# Altium PCB PCB_prob_2024-08-28.pcbdoc
Units mm, origin at the board's own origin, x right, y up, seen from the top; angles counter-clockwise.
Board outline 332.87 x 129.79 mm, 2 copper layers (Top Layer, Bottom Layer); 57 components, 34 nets, 213 pads, 5 vias.
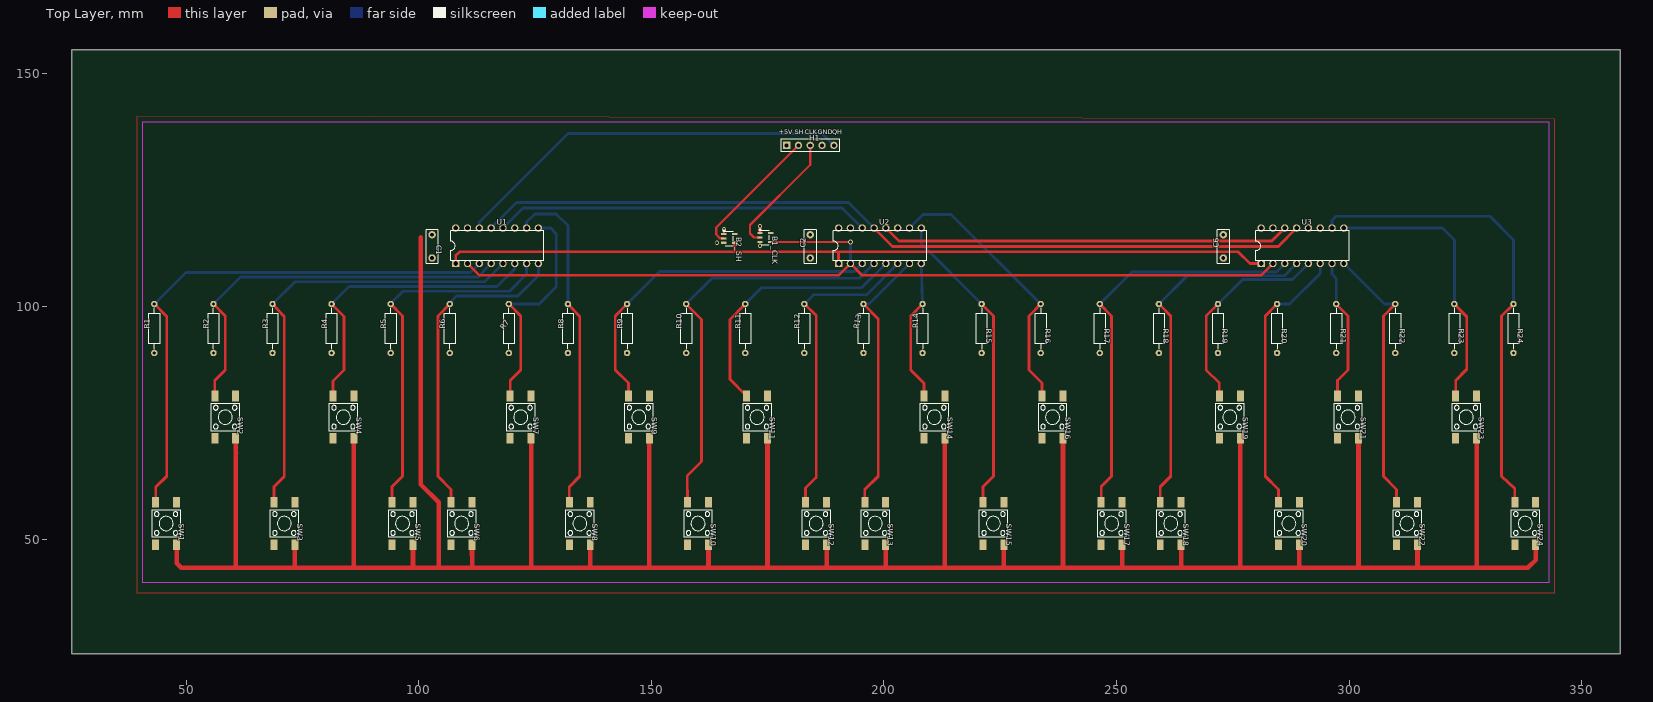
[diagram p0: Top Layer view]
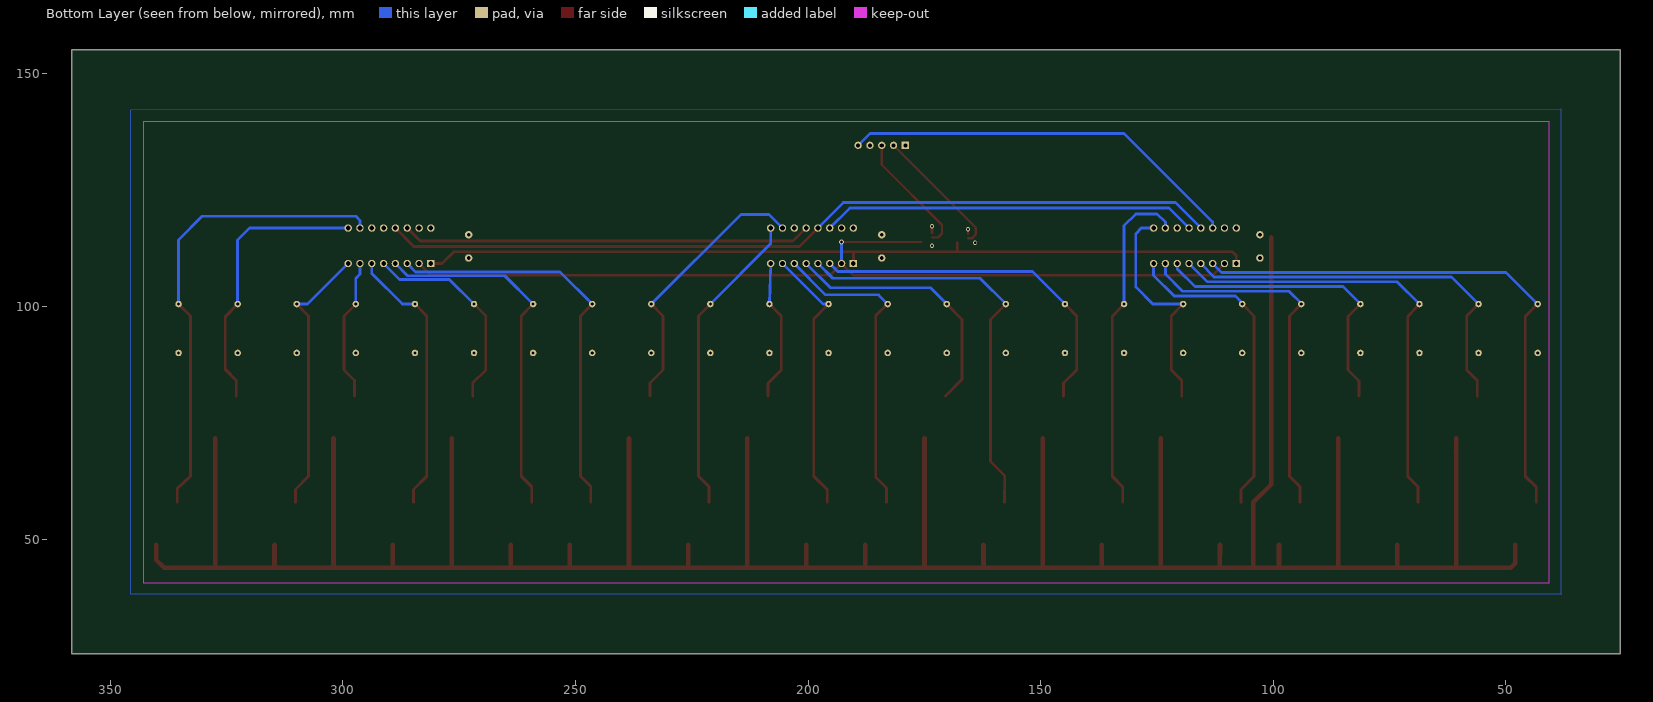
[diagram p1: Bottom Layer view, seen from below]

## Layer stack, top to bottom
Top Layer: signal copper (thickness not stored)
Dielectric: dielectric 0.32, FR-4, Dk 4.8
Bottom Layer: signal copper (thickness not stored)

## Board outline
358.267,25.4 25.4,25.4 25.4,155.194 358.267,155.194

## Components (designator, comment, footprint, x,y, rotation, side; value= is the part's Value field where it differs from the comment)
B1_CLK "SN74LVC1G125DBVR" SOT-23-5_L3.0-W1.7-P0.95-LS2.8-BL 174.498,114.808 r270 top
B2_SH "SN74LVC1G125DBVR" SOT-23-5_L3.0-W1.7-P0.95-LS2.8-BL 166.751,114.615 r270 top
C1 "100nF" CAP-TH_L7.2-W2.5-P5.00-D0.5 102.87,112.903 r270 top
C2 "100nF" CAP-TH_L7.2-W2.5-P5.00-D0.5 184.15,112.903 r90 top
C6 "100nF" CAP-TH_L7.2-W2.5-P5.00-D0.5 272.923,112.903 r90 top
H1 "HDR-F-2.54_1x5" HDR-F-2.54_1X5 184.15,134.62 r0 top
R1 "110kΩ" RES-TH_BD2.3-L6.5-P10.50-D0.5 43.18,95.25 r90 top
R2 "110kΩ" RES-TH_BD2.3-L6.5-P10.50-D0.5 55.88,95.25 r90 top
R3 "110kΩ" RES-TH_BD2.3-L6.5-P10.50-D0.5 68.58,95.25 r90 top
R4 "110kΩ" RES-TH_BD2.3-L6.5-P10.50-D0.5 81.28,95.25 r90 top
R5 "110kΩ" RES-TH_BD2.3-L6.5-P10.50-D0.5 93.98,95.25 r90 top
R6 "110kΩ" RES-TH_BD2.3-L6.5-P10.50-D0.5 106.68,95.25 r90 top
R7 "110kΩ" RES-TH_BD2.3-L6.5-P10.50-D0.5 119.38,95.25 r90 top
R8 "110kΩ" RES-TH_BD2.3-L6.5-P10.50-D0.5 132.08,95.25 r90 top
R9 "110kΩ" RES-TH_BD2.3-L6.5-P10.50-D0.5 144.78,95.25 r270 top
R10 "110kΩ" RES-TH_BD2.3-L6.5-P10.50-D0.5 157.48,95.25 r270 top
R11 "110kΩ" RES-TH_BD2.3-L6.5-P10.50-D0.5 170.18,95.25 r270 top
R12 "110kΩ" RES-TH_BD2.3-L6.5-P10.50-D0.5 182.88,95.25 r270 top
R13 "110kΩ" RES-TH_BD2.3-L6.5-P10.50-D0.5 195.58,95.25 r270 top
R14 "110kΩ" RES-TH_BD2.3-L6.5-P10.50-D0.5 208.28,95.25 r270 top
R15 "110kΩ" RES-TH_BD2.3-L6.5-P10.50-D0.5 220.98,95.25 r270 top
R16 "110kΩ" RES-TH_BD2.3-L6.5-P10.50-D0.5 233.68,95.25 r270 top
R17 "110kΩ" RES-TH_BD2.3-L6.5-P10.50-D0.5 246.38,95.25 r270 top
R18 "110kΩ" RES-TH_BD2.3-L6.5-P10.50-D0.5 259.08,95.25 r270 top
R19 "110kΩ" RES-TH_BD2.3-L6.5-P10.50-D0.5 271.78,95.25 r270 top
R20 "110kΩ" RES-TH_BD2.3-L6.5-P10.50-D0.5 284.48,95.25 r270 top
R21 "110kΩ" RES-TH_BD2.3-L6.5-P10.50-D0.5 297.179,95.25 r270 top
R22 "110kΩ" RES-TH_BD2.3-L6.5-P10.50-D0.5 309.879,95.25 r270 top
R23 "110kΩ" RES-TH_BD2.3-L6.5-P10.50-D0.5 322.579,95.25 r270 top
R24 "110kΩ" RES-TH_BD2.3-L6.5-P10.50-D0.5 335.279,95.25 r270 top
SW1 "SW" SW-SMD_4P-L6.0-W6.0-P4.50-LS9.0-2 45.72,53.34 r270 top
SW2 "SW" SW-SMD_4P-L6.0-W6.0-P4.50-LS9.0-2 58.42,76.2 r270 top
SW3 "SW" SW-SMD_4P-L6.0-W6.0-P4.50-LS9.0-2 71.12,53.34 r270 top
SW4 "SW" SW-SMD_4P-L6.0-W6.0-P4.50-LS9.0-2 83.82,76.2 r270 top
SW5 "SW" SW-SMD_4P-L6.0-W6.0-P4.50-LS9.0-2 96.52,53.34 r270 top
SW6 "SW" SW-SMD_4P-L6.0-W6.0-P4.50-LS9.0-2 109.22,53.34 r270 top
SW7 "SW" SW-SMD_4P-L6.0-W6.0-P4.50-LS9.0-2 121.92,76.2 r270 top
SW8 "SW" SW-SMD_4P-L6.0-W6.0-P4.50-LS9.0-2 134.62,53.34 r270 top
SW9 "SW" SW-SMD_4P-L6.0-W6.0-P4.50-LS9.0-2 147.32,76.2 r270 top
SW10 "SW" SW-SMD_4P-L6.0-W6.0-P4.50-LS9.0-2 160.02,53.34 r270 top
SW11 "SW" SW-SMD_4P-L6.0-W6.0-P4.50-LS9.0-2 172.72,76.2 r270 top
SW12 "SW" SW-SMD_4P-L6.0-W6.0-P4.50-LS9.0-2 185.42,53.34 r270 top
SW13 "SW" SW-SMD_4P-L6.0-W6.0-P4.50-LS9.0-2 198.12,53.34 r270 top
SW14 "SW" SW-SMD_4P-L6.0-W6.0-P4.50-LS9.0-2 210.82,76.2 r270 top
SW15 "SW" SW-SMD_4P-L6.0-W6.0-P4.50-LS9.0-2 223.52,53.34 r270 top
SW16 "SW" SW-SMD_4P-L6.0-W6.0-P4.50-LS9.0-2 236.22,76.2 r270 top
SW17 "SW" SW-SMD_4P-L6.0-W6.0-P4.50-LS9.0-2 248.92,53.34 r270 top
SW18 "SW" SW-SMD_4P-L6.0-W6.0-P4.50-LS9.0-2 261.62,53.34 r270 top
SW19 "SW" SW-SMD_4P-L6.0-W6.0-P4.50-LS9.0-2 274.32,76.2 r270 top
SW20 "SW" SW-SMD_4P-L6.0-W6.0-P4.50-LS9.0-2 287.02,53.34 r270 top
SW21 "SW" SW-SMD_4P-L6.0-W6.0-P4.50-LS9.0-2 299.719,76.2 r270 top
SW22 "SW" SW-SMD_4P-L6.0-W6.0-P4.50-LS9.0-2 312.419,53.34 r270 top
SW23 "SW" SW-SMD_4P-L6.0-W6.0-P4.50-LS9.0-2 325.119,76.2 r270 top
SW24 "SW" SW-SMD_4P-L6.0-W6.0-P4.50-LS9.0-2 337.819,53.34 r270 top
U1 "SN74HC165N" DIP-16_L19.8-W6.5-P2.54-LS7.6-BL 116.84,113.03 r0 top
U2 "SN74HC165N" DIP-16_L19.8-W6.5-P2.54-LS7.6-BL 199.136,113.03 r0 top
U3 "SN74HC165N" DIP-16_L19.8-W6.5-P2.54-LS7.6-BL 289.941,113.03 r0 top

## Footprints (in the part's own frame and the unit in brackets; to place one, negate y for a bottom-side part, rotate by r counter-clockwise, add the part's x,y. Pads: shape width x height; smd on the part's side, far side on the other; paste and mask are expansions set on the pad)
CAP-TH_L7.2-W2.5-P5.00-D0.5 [mm]
  round 1.6 hole 0.8 paste+0 mask+0.05: 1(-2.5,0) 2(2.5,0)
  silkscreen extent -3.6,-1.25 3.6,1.25
DIP-16_L19.8-W6.5-P2.54-LS7.6-BL [mm]
  rect 1.6x1.6 hole 1 paste+0 mask+0.051: 1(-8.89,-3.81)
  round 1.6 hole 1 paste+0 mask+0.051: 2(-6.35,-3.81) 3(-3.81,-3.81) 4(-1.27,-3.81) 5(1.27,-3.81) 6(3.81,-3.81) 7(6.35,-3.81) 8(8.89,-3.81) 9(8.89,3.81) 10(6.35,3.81) 11(3.81,3.81) 12(1.27,3.81) 13(-1.27,3.81) 14(-3.81,3.81) 15(-6.35,3.81) 16(-8.89,3.81)
  silkscreen extent -10,-3.2 10,3.2
HDR-F-2.54_1X5 [mil]
  rect 62x62 hole 35 paste+0 mask+2: 1(-200,0)
  round 62 hole 35 paste+0 mask+2: 2(-100,0) 3(0,0) 4(100,0) 5(200,0)
  silkscreen extent -250,-50 250,50
RES-TH_BD2.3-L6.5-P10.50-D0.5 [mm]
  round 1.4 hole 0.7 paste+0 mask+0.051: 1(-5.25,0) 2(5.25,0)
  silkscreen extent -4.32,-1.15 4.32,1.15
SOT-23-5_L3.0-W1.7-P0.95-LS2.8-BL [mm]
  rect 0.49x1.157 smd paste+0 mask+0.051: 1(-0.95,-1.154) 2(0,-1.154) 3(0.95,-1.154)
  rect 0.49x1.175 smd paste+0 mask+0.051: 4(0.95,1.154) 5(-0.95,1.154)
  silkscreen extent -1.8,-1.29 1.53,0.85
SW-SMD_4P-L6.0-W6.0-P4.50-LS9.0-2 [mm]
  rect 2.3x1.5 smd paste+0 mask+0.051: 1(-4.55,2.25) 2(4.55,2.25) 3(-4.55,-2.25) 4(4.55,-2.25)
  silkscreen extent -3,-3 3,3

## Via types
v1: diameter 0.9, hole 0.5, Top Layer to Bottom Layer, tented both sides, 4 vias
v2: diameter 1, hole 0.6, Top Layer to Bottom Layer, tented both sides, 1 vias

## Nets (pads, with @x,y where several pads share a name; then routed paths per layer and width w, separated by ;. In a path a pad name is that pad's centre, name@x,y a point inside that pad or via, vN(x,y) a via of type N, cw(c..) or ccw(c..) an arc to the next point about the centre after c; other vN are vias at no path point)
CLK: B1_CLK.2 H1.3 | length 26.8
  Top Layer w0.5: B1_CLK.2 172.085,114.808 171.196,115.697 171.196,117.475 184.15,130.429 H1.3
CLK_OUT: B1_CLK.4 U1.2 U2.2 U3.2 | length 199.1
  Top Layer w0.5: B1_CLK.4 v2(192.786,113.858)
  Top Layer w0.6: U1.2 113.03,106.68 190.246,106.68 U2.2 195.326,106.68 281.051,106.68 U3.2
  Bottom Layer w0.6: U2.2 v2(192.786,113.858)
GND_PORT: B1_CLK.1 B1_CLK.3 B2_SH.1 B2_SH.3 C1.2 C2.1 C6.1 H1.4 R1.1 R2.1 R3.1 R4.1 R5.1 R6.1 R7.1 R8.1 R9.2 R10.2 R11.2 R12.2 R13.2 R14.2 R15.2 R16.2 R17.2 R18.2 R19.2 R20.2 R21.2 R22.2 R23.2 R24.2 U1.11 U1.15 U2.11 U2.15 U3.11 U3.15 | length 2.5
  Top Layer w0.4: B2_SH.1@165.608,115.57 v1(165.608,116.586)
  Top Layer w0.6: B1_CLK.1 v1(173.344,117.221)
  other v1: 173.355,113.03 164.084,113.665
QH: H1.5 U1.14 | length 86.4
  Bottom Layer w0.6: U1.14 113.03,118.11 132.08,137.16 186.69,137.16 H1.5
QH#: U1.13 U2.13 U3.13 | length 180.9
  Top Layer w0.6: U2.13 201.803,112.903 284.734,112.903 U3.13
  Bottom Layer w0.6: U1.13 121.031,122.301 192.405,122.301 U2.13
SH/LD#: B2_SH.2 H1.2 | length 28.5
  Top Layer w0.5: B2_SH.2 164.785,114.615 163.957,115.443 163.957,116.967 H1.2
SH/LD#_OUT: B2_SH.4 U1.1 U2.1 U3.1 | length 181.8
  Top Layer w0.6: U1.1 107.95,110.907 108.839,111.76 173.177,111.76 190.246,111.76 ; 167.905,111.76 B2_SH.4 ; U2.1 190.246,111.76 ; 190.246,110.617 190.246,111.76 ; U3.1 279.923,109.22 278.638,109.22 276.098,111.76 190.246,111.76
U1: R1.2 SW1.3 U1.3 | length 118.2
  Top Layer w0.6: R1.2 45.847,97.833 45.847,63.5 43.47,61.123 SW1.3
  Bottom Layer w0.6: R1.2 49.995,107.315 111.125,107.315 U1.3
U2: R2.2 SW2.3 U1.4 | length 85.1
  Top Layer w0.6: R2.2 58.42,97.96 58.42,86.36 56.17,84.11 SW2.3
  Bottom Layer w0.6: R2.2 61.679,106.299 112.776,106.299 U1.4
U2_14: U1.12 U2.14 | length 80.8
  Bottom Layer w0.6: U1.12 122.428,121.158 191.008,121.158 U2.14
U3: R3.2 SW3.3 U1.5 | length 97.7
  Top Layer w0.6: R3.2 71.12,97.833 71.12,63.5 68.87,61.25 SW3.3
  Bottom Layer w0.6: R3.2 73.363,105.283 114.173,105.283 U1.5
U3_14: U2.12 U3.14 | length 88
  Top Layer w0.6: U2.12 203.2,114.046 283.337,114.046 U3.14
U4: R4.2 SW4.3 U1.6 | length 65.5
  Top Layer w0.6: R4.2 83.947,97.833 83.947,86.36 81.57,83.983 SW4.3
  Bottom Layer w0.6: R4.2 85.047,104.267 116.84,104.267 120.65,108.077 U1.6
U5: R5.2 SW5.3 U1.7 | length 78.9
  Top Layer w0.6: R5.2 96.52,97.96 96.52,63.5 94.27,61.25 SW5.3
  Bottom Layer w0.6: R5.2@93.853,100.5 96.604,103.251 119.507,103.251 123.19,106.934 U1.7
U6: R6.2 SW6.3 U1.8 | length 68.7
  Top Layer w0.6: R6.2 104.14,97.96 104.14,63.5 106.97,60.67 SW6.3
  Bottom Layer w0.6: R6.2@106.807,100.881 108.161,102.235 121.285,102.235 125.73,106.68 U1.8
U7: R7.2 SW7.3 U1.9 | length 49.2
  Top Layer w0.6: R7.2 121.92,97.96 121.92,86.36 119.67,84.11 SW7.3
  Bottom Layer w0.6: R7.2 125.9,100.5 129.54,104.14 129.54,115.57 128.397,116.84 U1.9
U8: R8.2 SW8.3 U1.10 | length 73.4
  Top Layer w0.6: R8.2 134.62,97.833 134.62,63.5 132.37,61.25 SW8.3
  Bottom Layer w0.6: U1.10 123.19,118.11 124.968,119.888 129.54,119.888 132.079,117.349 R8.2
U9: R9.1 SW9.3 U2.3 | length 76.1
  Top Layer w0.6: R9.1 142.24,97.96 142.24,86.36 145.07,83.53 SW9.3
  Bottom Layer w0.6: R9.1 151.773,107.493 193.599,107.493 U2.3
U10: R10.1 SW10.3 U2.4 | length 89.2
  Top Layer w0.6: R10.1 160.782,97.198 160.782,66.675 157.734,63.627 157.734,63.5 SW10.3
  Bottom Layer w0.6: R10.1 163.025,106.045 194.691,106.045 U2.4
U11: R11.1 SW11.3 U2.5 | length 56.4
  Top Layer w0.6: R11.1 166.878,97.198 166.878,84.341 SW11.3
  Bottom Layer w0.6: R11.1 173.693,104.013 195.199,104.013 U2.5
U12: R12.1 SW12.3 U2.6 | length 68.3
  Top Layer w0.6: R12.1 185.42,98.087 185.42,63.246 183.134,60.96 183.134,57.926 SW12.3
  Bottom Layer w0.6: R12.1 184.869,102.489 196.215,102.489 U2.6
U13: R13.1 SW13.3 U2.7 | length 58.6
  Top Layer w0.6: R13.1 198.755,97.325 198.755,63.5 195.87,60.615 SW13.3
  Bottom Layer w0.6: R13.1 196.766,100.5 U2.7
U14: R14.1 SW14.3 U2.8 | length 30.7
  Top Layer w0.6: R14.1 205.74,97.96 205.74,86.36 208.534,83.566 208.534,83.439 208.57,83.403 SW14.3
  Bottom Layer w0.6: U2.8 R14.1
U15: R15.1 SW15.3 U2.9 | length 66.3
  Top Layer w0.6: R15.1 223.52,97.96 223.52,63.5 221.27,61.25 SW15.3
  Bottom Layer w0.6: U2.9 208.026,113.454 R15.1
U16: R16.1 SW16.3 U2.10 | length 59.4
  Top Layer w0.6: R16.1 231.14,97.96 231.14,86.36 233.97,83.53 SW16.3
  Bottom Layer w0.6: U2.10 208.407,119.761 214.419,119.761 R16.1
U17: R17.1 SW17.3 U3.3 | length 88
  Top Layer w0.6: R17.1 248.92,97.96 248.92,63.5 246.67,61.25 SW17.3
  Bottom Layer w0.6: R17.1 253.29,107.41 284.321,107.41 U3.3
U18: R18.1 SW18.3 U3.4 | length 77.8
  Top Layer w0.6: R18.1 261.62,97.96 261.62,63.5 259.37,61.25 SW18.3
  Bottom Layer w0.6: R18.1 265.174,106.594 286.045,106.594 U3.4
U19: R19.1 SW19.3 U3.5 | length 45
  Top Layer w0.6: R19.1 269.24,97.96 269.24,86.36 272.07,83.53 SW19.3
  Bottom Layer w0.6: R19.1 271.823,100.5 277.114,105.791 287.782,105.791 U3.5
U20: R20.1 SW20.3 U3.6 | length 59
  Top Layer w0.6: R20.1 281.94,97.96 281.94,63.5 284.77,60.67 SW20.3
  Bottom Layer w0.6: R20.1 287.19,100.5 293.751,107.061 U3.6
U21: R21.1 SW21.3 U3.7 | length 30.8
  Top Layer w0.6: R21.1 299.72,97.96 299.72,86.36 297.47,84.11 SW21.3
  Bottom Layer w0.6: U3.7 296.291,106.934 297.18,106.045 R21.1
U22: R22.1 SW22.3 U3.8 | length 59.5
  Top Layer w0.6: R22.1 307.34,97.96 307.34,63.5 310.17,60.67 SW22.3
  Bottom Layer w0.6: U3.8 307.551,100.5 R22.1
U23: R23.1 SW23.3 U3.9 | length 60.6
  Top Layer w0.6: R23.1 322.579,100.458 325.247,97.79 325.247,86.487 322.869,84.109 SW23.3
  Bottom Layer w0.6: U3.9 320.04,116.84 322.58,114.3 R23.1@322.58,100.373
U24: R24.1 SW24.3 U3.10 | length 101.8
  Top Layer w0.6: R24.1 335.279,100.456 332.74,97.917 332.74,63.5 335.569,60.798 SW24.3
  Bottom Layer w0.6: U3.10 296.291,118.491 297.18,119.38 330.2,119.38 335.28,114.3 R24.1
VCC_PORT: B1_CLK.5 B2_SH.5 C1.1 C2.2 C6.2 H1.1 SW1.2 SW2.2 SW3.2 SW4.2 SW5.2 SW6.2 SW7.2 SW8.2 SW9.2 SW10.2 SW11.2 SW12.2 SW13.2 SW14.2 SW15.2 SW16.2 SW17.2 SW18.2 SW19.2 SW20.2 SW21.2 SW22.2 SW23.2 SW24.2 U1.16 U2.16 U3.16 | length 711.5
  Top Layer w0.254: SW5.2@98.77,48.478 SW5.2
  Top Layer w1: SW1.2 47.97,44.828 48.983,43.815 ; 49.022,43.815 338.392,43.815 340.069,45.493 SW24.2 ; SW2.2 60.67,68.58 60.731,68.519 ; 60.706,43.815 60.706,68.58 ; 73.371,43.815 SW3.2 ; 86.071,43.815 86.07,68.58 SW4.2 ; 98.77,43.815 SW5.2 ; 100.457,114.808 100.457,61.722 104.283,57.896 104.283,43.815 ; 111.471,43.815 SW6.2 ; SW7.2 124.206,71.614 124.206,68.58 124.206,43.815 ; 136.871,43.815 SW8.2 ; 149.57,68.58 SW9.2 ; 149.571,43.815 149.57,68.58 ; 162.271,43.815 SW10.2 ; 174.97,68.453 SW11.2 ; 174.971,43.815 174.97,68.453 ; 187.671,43.815 SW12.2 ; 200.371,43.815 SW13.2 ; 213.07,43.815 213.07,68.58 ; 213.07,68.58 SW14.2 ; 225.771,43.815 SW15.2 ; 238.47,43.815 238.47,68.616 SW16.2 ; 251.171,43.815 SW17.2 ; 263.871,43.815 SW18.2 ; 276.571,43.815 276.57,68.58 SW19.2 ; 289.27,43.815 SW20.2 ; SW21.2@301.968,71.651 301.97,68.58 ; 301.969,43.815 301.969,68.58 ; 314.669,43.815 SW22.2 ; SW23.2 327.406,71.614 327.406,68.58 327.406,43.815
pads on no net: SW1.1 SW1.4 SW2.1 SW2.4 SW3.1 SW3.4 SW4.1 SW4.4 SW5.1 SW5.4 SW6.1 SW6.4 SW7.1 SW7.4 SW8.1 SW8.4 SW9.1 SW9.4 SW10.1 SW10.4 SW11.1 SW11.4 SW12.1 SW12.4 SW13.1 SW13.4 SW14.1 SW14.4 SW15.1 SW15.4 SW16.1 SW16.4 SW17.1 SW17.4 SW18.1 SW18.4 SW19.1 SW19.4 SW20.1 SW20.4 SW21.1 SW21.4 SW22.1 SW22.4 SW23.1 SW23.4 SW24.1 SW24.4 U3.12

## Polygon pours and split planes (outlines as drawn)
GND_PORT on Bottom Layer (solid): 38.227,142.494 38.227,38.227 38.1,38.1 345.567,38.1 345.567,142.113 345.44,142.24
VCC_PORT on Top Layer (solid): 282.321,116.332 282.321,141.097 98.679,141.097 98.679,114.427 282.321,114.427
GND_PORT on Top Layer (solid): 39.37,140.906 39.37,38.417 344.17,38.417 344.17,140.272

## Silkscreen, mask and mechanical layers (free items; w line width, h text height)
Top Overlay:
  text "+5V" at 177.419,137.041 h1
  text "SH" at 180.848,137.041 h1
  text "CLK" at 183.007,137.041 h1
  text "GND" at 185.801,137.041 h1
  text "QH" at 188.849,137.041 h1